# Altium PCB LIMITSWITCH_PCB.PcbDoc
Units mm, origin at the board's own origin, x right, y up, seen from the top; angles counter-clockwise.
Board outline 47 x 57 mm, 2 copper layers (Top Layer, Bottom Layer); 10 components, 6 nets, 26 pads, 4 vias.
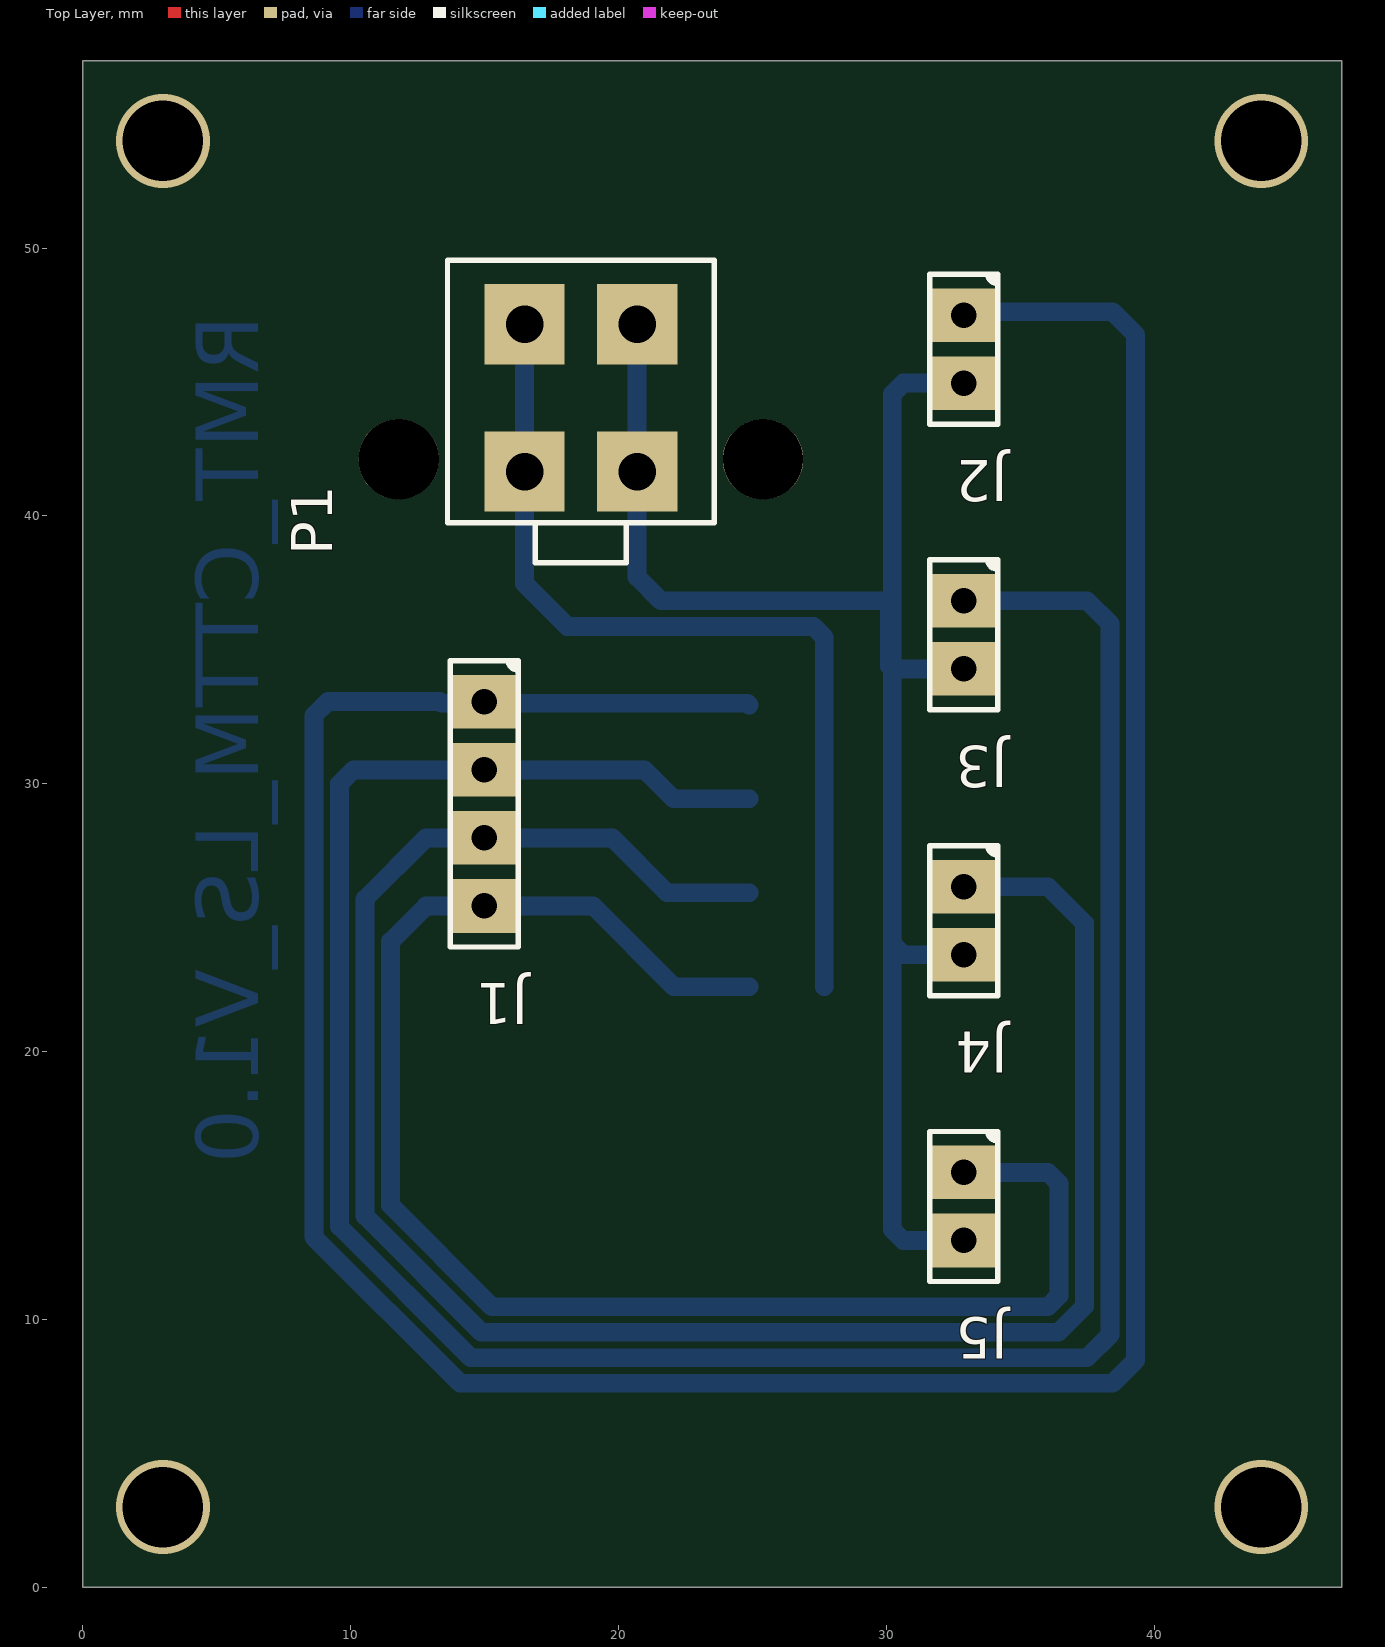
[diagram p0: Top Layer view]
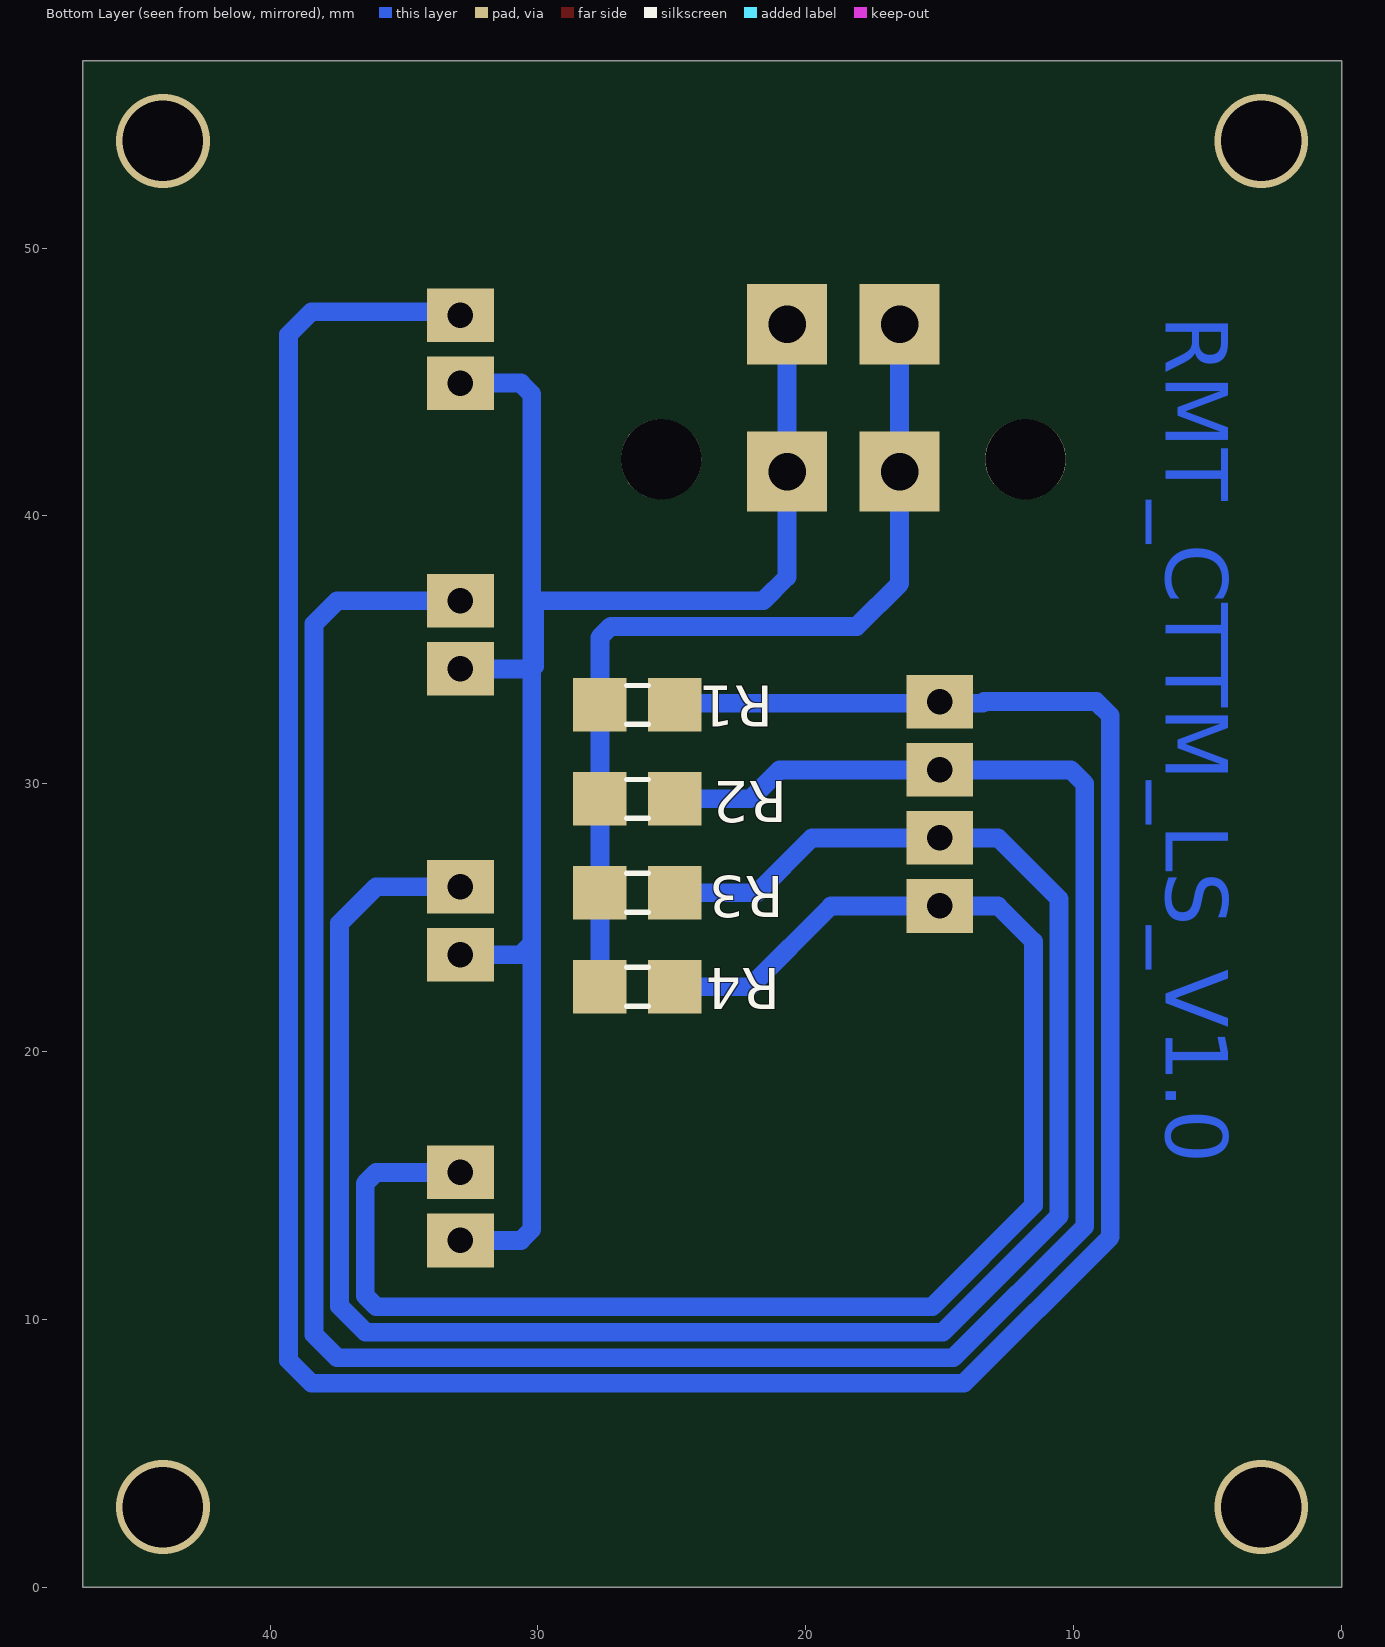
[diagram p1: Bottom Layer view, seen from below]
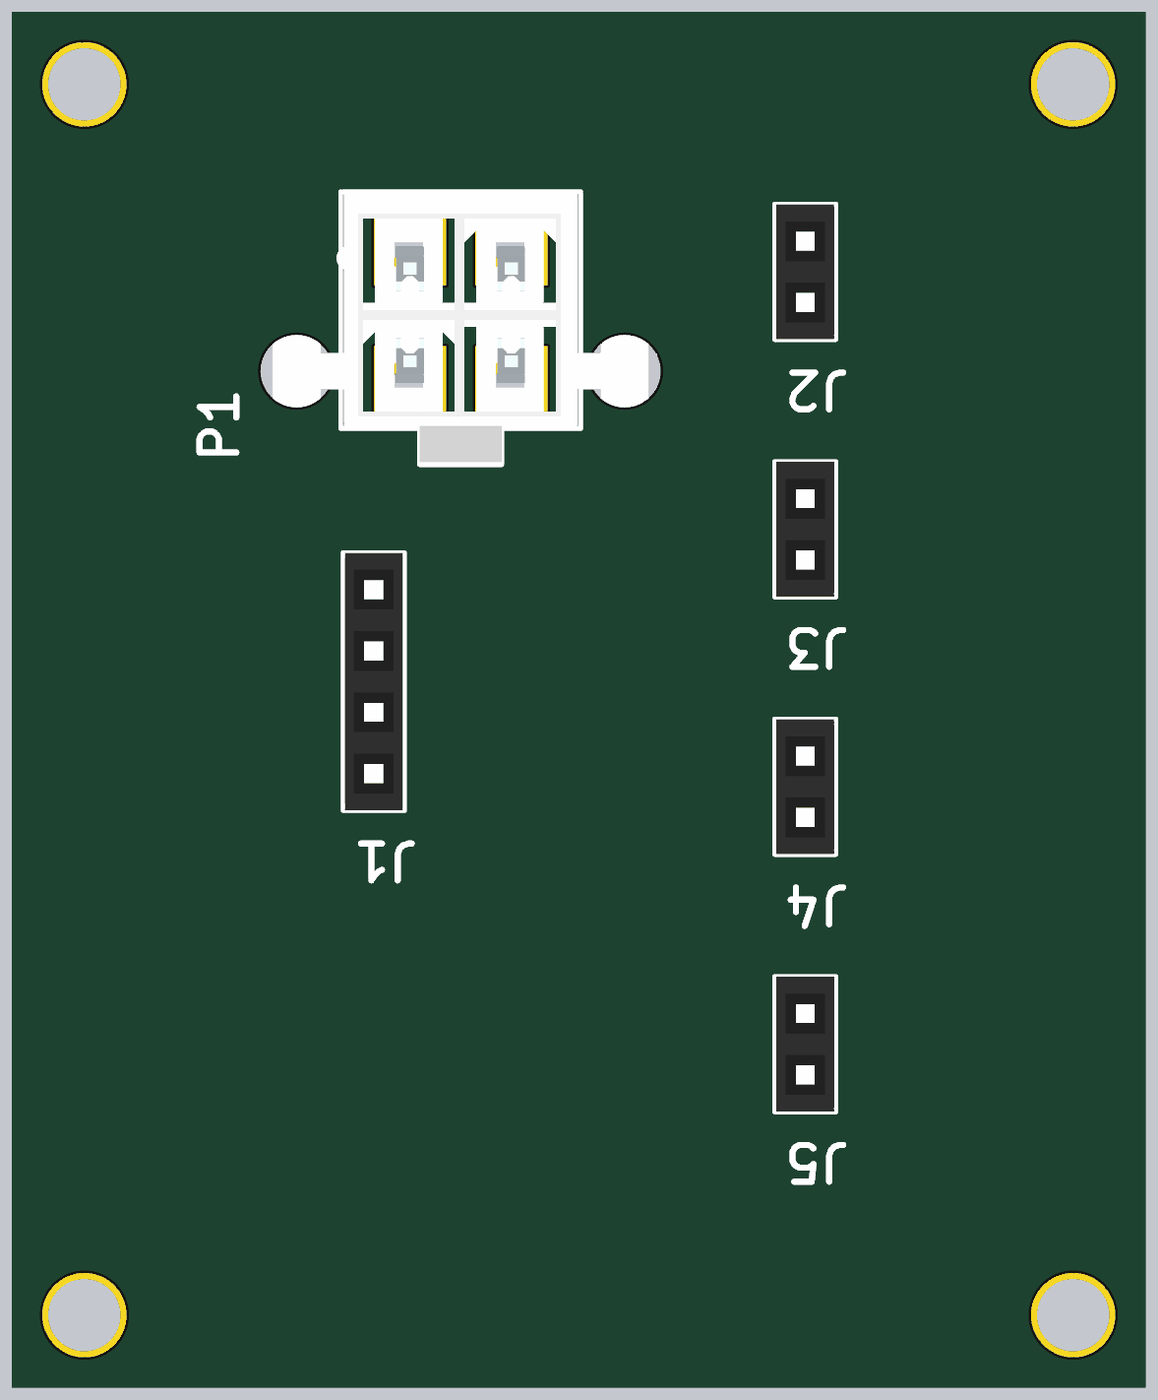
[diagram p2: 3D render of the assembled board from above, using the file's embedded part models]

## Layer stack, top to bottom
Top Solder: solder mask 0.0102, Solder Resist, Dk 3.5
Top Layer: signal copper 0.0356
Dielectric 1: dielectric 0.32, FR-4, Dk 4.8
Bottom Layer: signal copper 0.0356
Bottom Solder: solder mask 0.0102, Solder Resist, Dk 3.5

## Board outline
0,0 0,57 47,57 47,0

## Design rules (kind name [scope] priority, off if disabled: settings)
Clearance [All] p1: gap=0.254 ignorepadtopadclearanceinfootprint=FALSE except(0: Arc-Hole Track-Hole SMDPad-Hole THPad-Hole Via-Hole Fill-Hole Poly-Hole Region-Hole Text-Hole)
PolygonConnect [All] p1: connectstyle=Relief reliefconductorwidth=0.254 reliefentries=4 polygonreliefangle="90 Angle" airgapwidth=0.254
RoutingVias [All] p1: holewidth=0.711 width=1.27 viastyle="Through Hole" minholewidth=0.711 minwidth=1.27 maxholewidth=0.711 maxwidth=1.27
SolderMaskExpansion [All] p1: expansion=0.102 istentingtop=FALSE
Width [All] p1: maxlimit=0.7 minlimit=0.7 preferedwidth=0.7
30 further rules are at their usual default settings.

## Components (designator, comment, footprint, x,y, rotation, side; value= is the part's Value field where it differs from the comment)
J1 "SSW-104-03-T-S" "SAMTEC SSW-104-03-T-S" 15,29.25 r270 top
J2 "SSW-102-03-T-S" "SAMTEC SSW-102-03-T-S" 32.893,46.228 r270 top
J3 "SSW-102-03-T-S" "SAMTEC SSW-102-03-T-S" 32.893,35.56 r270 top
J4 "SSW-102-03-T-S" "SAMTEC SSW-102-03-T-S" 32.893,24.892 r270 top
J5 "SSW-102-03-T-S" "SAMTEC SSW-102-03-T-S" 32.893,14.224 r270 top
P1 "649004221732" 649004221732 18.601,44.646 r180 top
R1 "CRA06E08310K0JTA" RESC3215X60X61NL15T15 26.286,32.944 r0 bottom
R2 "CRA06E08310K0JTA" RESC3215X60X61NL15T15 26.286,29.439 r0 bottom
R3 "CRA06E08310K0JTA" RESC3215X60X61NL15T15 26.286,25.933 r0 bottom
R4 "CRA06E08310K0JTA" RESC3215X60X61NL15T15 26.286,22.428 r0 bottom

## Footprints (in the part's own frame and the unit in brackets; to place one, negate y for a bottom-side part, rotate by r counter-clockwise, add the part's x,y. Pads: shape width x height; smd on the part's side, far side on the other; paste and mask are expansions set on the pad)
649004221732 [mm] "4.20mm Male Dual Row Vertical Header with Mounting Pegs, 4p"
  rect 3x3 hole 1.4: 1(2.1,-2.51) 2(-2.1,-2.51) 3(2.1,2.99) 4(-2.1,2.99)
  round 3 hole 3 unplated: MH1(-6.8,2.53) MH2(6.8,2.53)
  silkscreen extent -4.97,-4.9 4.98,6.4, body extent -7.8,-4.8 7.8,6.3, height 12.84
RESC3215X60X61NL15T15 [mm] "Chip Resistor, 2-Leads, Body 3.20x1.50mm, IPC Medium Density"
  rect 2x2 smd: 1(-1.4,0) 2(1.4,0)
  silkscreen extent -0.4,-0.72 0.4,0.72, body extent -1.68,-0.82 1.68,0.82, height 0.6
"SAMTEC SSW-102-03-T-S" [mm]
  rect 2x2.5 hole 0.95: 1(-1.27,0) 2(1.27,0)
  silkscreen extent -2.8,-1.27 2.8,1.27, body extent -2.79,-1.21 2.79,1.21, height 8.51
"SAMTEC SSW-104-03-T-S" [mm]
  rect 2x2.5 hole 0.95: 1(-3.81,0) 2(-1.27,0) 3(1.27,0) 4(3.81,0)
  silkscreen extent -5.34,-1.27 5.34,1.27, body extent -5.33,-1.21 5.33,1.21, height 8.51

## Part data
J1: "CONN RCPT 4POS 0.1 TIN PCB", Current Rating (Amps)="5.7A per Contact", Insulation Color=Black, Manufacturer="Samtec Inc.", Material Flammability Rating="UL94 V-0", Operating Temperature="-55°C ~ 105°C", Supplier Part Number 1=SSW-104-03-T-S-ND, ComponentLink2Description="DigiKey Link", ComponentLink2URL=http://digikey.com/product-detail/en/samtec-inc/SSW-104-03-T-S/SSW-104-03-T-S-ND/7874034, Connector Type=Receptacle, Contact Finish - Mating=Tin, Contact Finish - Post=Tin, Contact Type=Forked, Fastening Type=Push-Pull, LastUpdated="6/21/2022 3:08:52 PM", Lifecycle Status=Active, Minimum Order=1, Mounting Type="Through Hole", Number of Positions=4, Number of Positions Loaded=All, Number of Rows=1, Packaging=Bulk, Part Number=SSW-104-03-T-S, Part Status=Active, Price=0.83, Series=SSW, Style="Board to Board or Cable", Supplier 1=DigiKey, Termination=Solder
J2 J3 J4 J5: "CONN RCPT 2POS 0.1 TIN PCB", Current Rating (Amps)="5.7A per Contact", Insulation Color=Black, Manufacturer="Samtec Inc.", Material Flammability Rating="UL94 V-0", Operating Temperature="-55°C ~ 105°C", Supplier Part Number 1=SSW-102-03-T-S-ND, ComponentLink2Description="DigiKey Link", ComponentLink2URL=http://digikey.com/product-detail/en/samtec-inc/SSW-102-03-T-S/SSW-102-03-T-S-ND/7873010, Connector Type=Receptacle, Contact Finish - Mating=Tin, Contact Finish - Post=Tin, Contact Type=Forked, Fastening Type=Push-Pull, LastUpdated="6/21/2022 3:06:02 PM", Lifecycle Status=Active, Minimum Order=1, Mounting Type="Through Hole", Number of Positions=2, Number of Positions Loaded=All, Number of Rows=1, Packaging=Bulk, Part Number=SSW-102-03-T-S, Part Status=Active, Price=0.53, Series=SSW, Style="Board to Board or Cable", Supplier 1=DigiKey, Termination=Solder
P1: library part CMP-1502-00506-2, Color=White, Contact Resistance=10mΩ, Current Rating=8A, Insulation Resistance=1GΩ, Max Operating Temperature=105°C, Min Operating Temperature=-40°C, Operating Supply Voltage=600V, Connector Type="Male Pin, Plug", Contact Material=Copper, Contact Plating=Tin, Fastening Type=Ramp, Gender=Male, Height=12.8mm, Lead Pitch=4.2mm, Length=9.6mm, Mount="Through Hole", NexarPartId=23024601, Number of Contacts=4, Number of Pins=4, Number of Positions=4, Number of Rows=2, Orientation=Vertical, Pitch=4.2mm, REACH SVHC=Unknown, RoHS=Compliant, Row Spacing=4.191mm, Termination=Solder, Width=9.6mm
R1 R2 R3 R4: library part CMP-2003-04858-1, Manufacturer="Vishay Dale", RESISTANCE=10K, Part Number=CRA06E08310K0JTA

## Via types
v1: diameter 3.5, hole 3, Top Layer to Bottom Layer, 4 vias

## Nets (pads, with @x,y where several pads share a name; then routed paths per layer and width w, separated by ;. In a path a pad name is that pad's centre, name@x,y a point inside that pad or via, vN(x,y) a via of type N, cw(c..) or ccw(c..) an arc to the next point about the centre after c; other vN are vias at no path point)
+5V: P1.1 P1.3 R1.2 R2.2 R3.2 R4.2 | length 34.7
  Bottom Layer w0.7: P1.1 P1.3 16.501,37.474 18.099,35.876 27.276,35.876 27.686,35.466 R1.2 R2.2 R3.2 R4.2
GND: J2.2 J3.2 J4.2 J5.2 P1.2 P1.4 | length 64.2
  Bottom Layer w0.7: P1.2 P1.4 20.701,37.719 21.59,36.83 30.128,36.83 30.128,34.388 30.226,34.29 ; J5.2 30.636,12.954 30.226,13.364 30.226,24.032 ; J4.2 30.636,23.622 30.226,24.032 ; J3.2 30.226,34.29 ; J2.2 30.636,44.958 30.226,44.548 30.226,36.83 30.226,34.29 ; 30.226,24.032 30.226,34.29
MAX_LIM: J1.1 J2.1 R1.1 | length 114.4
  Bottom Layer w0.7: R1.1 24.823,33.007 15,33.007 13.399,33.007 13.335,33.071 9.16,33.071 8.638,32.549 8.638,13.079 14.097,7.62 38.452,7.62 39.311,8.479 39.311,46.766 38.452,47.625 33.02,47.625 J2.1
MIN_LIM: J1.2 J3.1 R2.1 | length 96
  Bottom Layer w0.7: R2.1 22.061,29.439 20.98,30.52 J1.2 10.114,30.52 9.592,29.998 9.592,13.474 14.492,8.574 37.498,8.574 38.357,9.433 38.357,35.971 37.498,36.83 J3.1
WATER_INT: J1.3 J4.1 R3.1 | length 76.4
  Bottom Layer w0.7: R3.1 21.817,25.933 19.77,27.98 J1.3 12.825,27.98 10.546,25.701 10.546,13.869 14.887,9.528 36.434,9.528 37.403,10.497 37.403,24.798 36.039,26.162 J4.1
WATER_INT2: J1.4 J5.1 R4.1 | length 59.6
  Bottom Layer w0.7: R4.1 22.072,22.428 19.06,25.44 J1.4 12.825,25.44 11.5,24.115 11.5,14.264 15.282,10.482 36.039,10.482 36.449,10.892 36.449,15.084 36.039,15.494 J5.1
pads on no net: P1.MH1 P1.MH2
copper on no net:
  other v1: 3,3 44,3 3,54 44,54

## Other copper
Bottom Layer:
  text "RMT_CTTM_LS_V1.0" at 7.33,47.497 h4 r90